# EAGLE board BrewTrollerV1.0 (EAGLE 5.00)
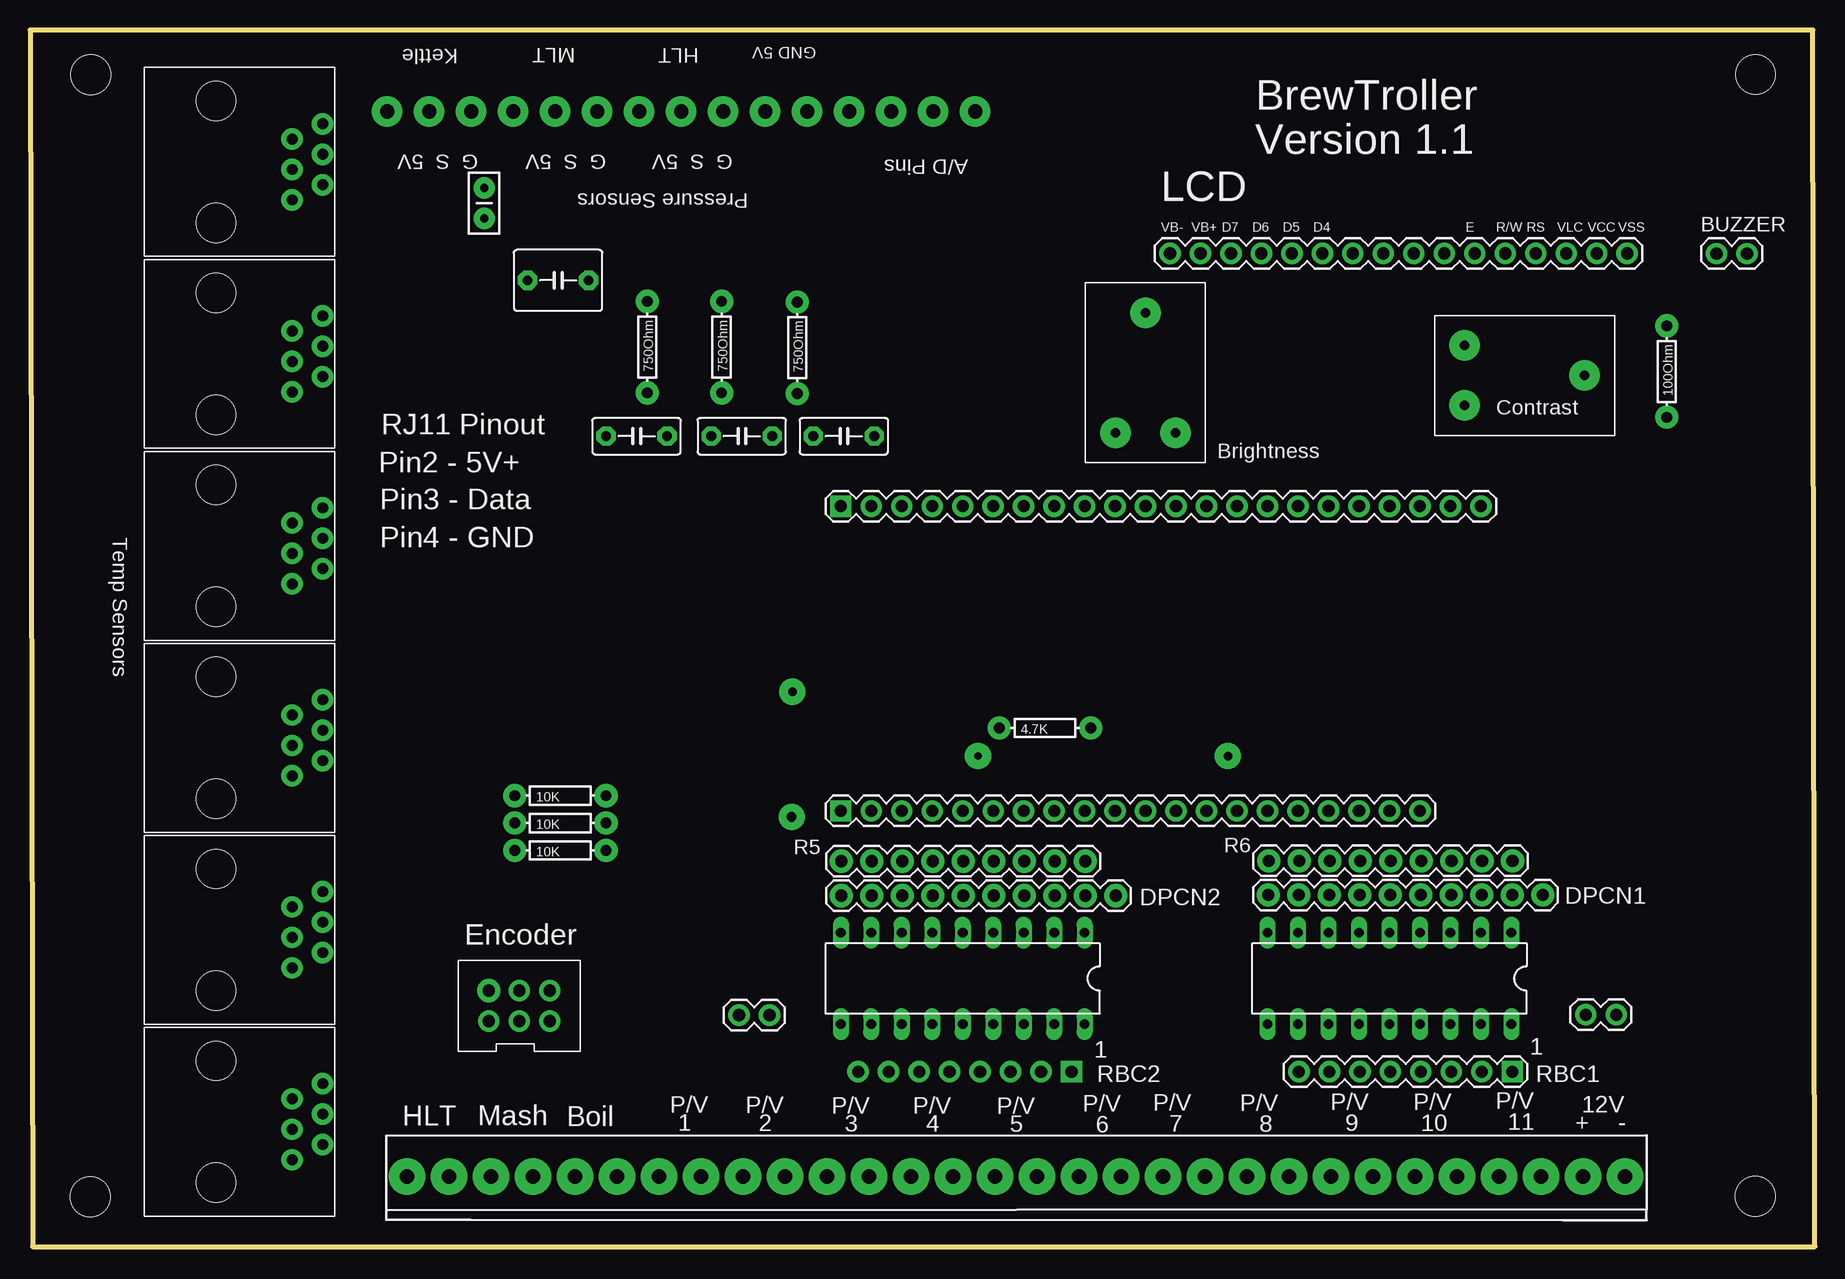
[diagram p0: board, top side]
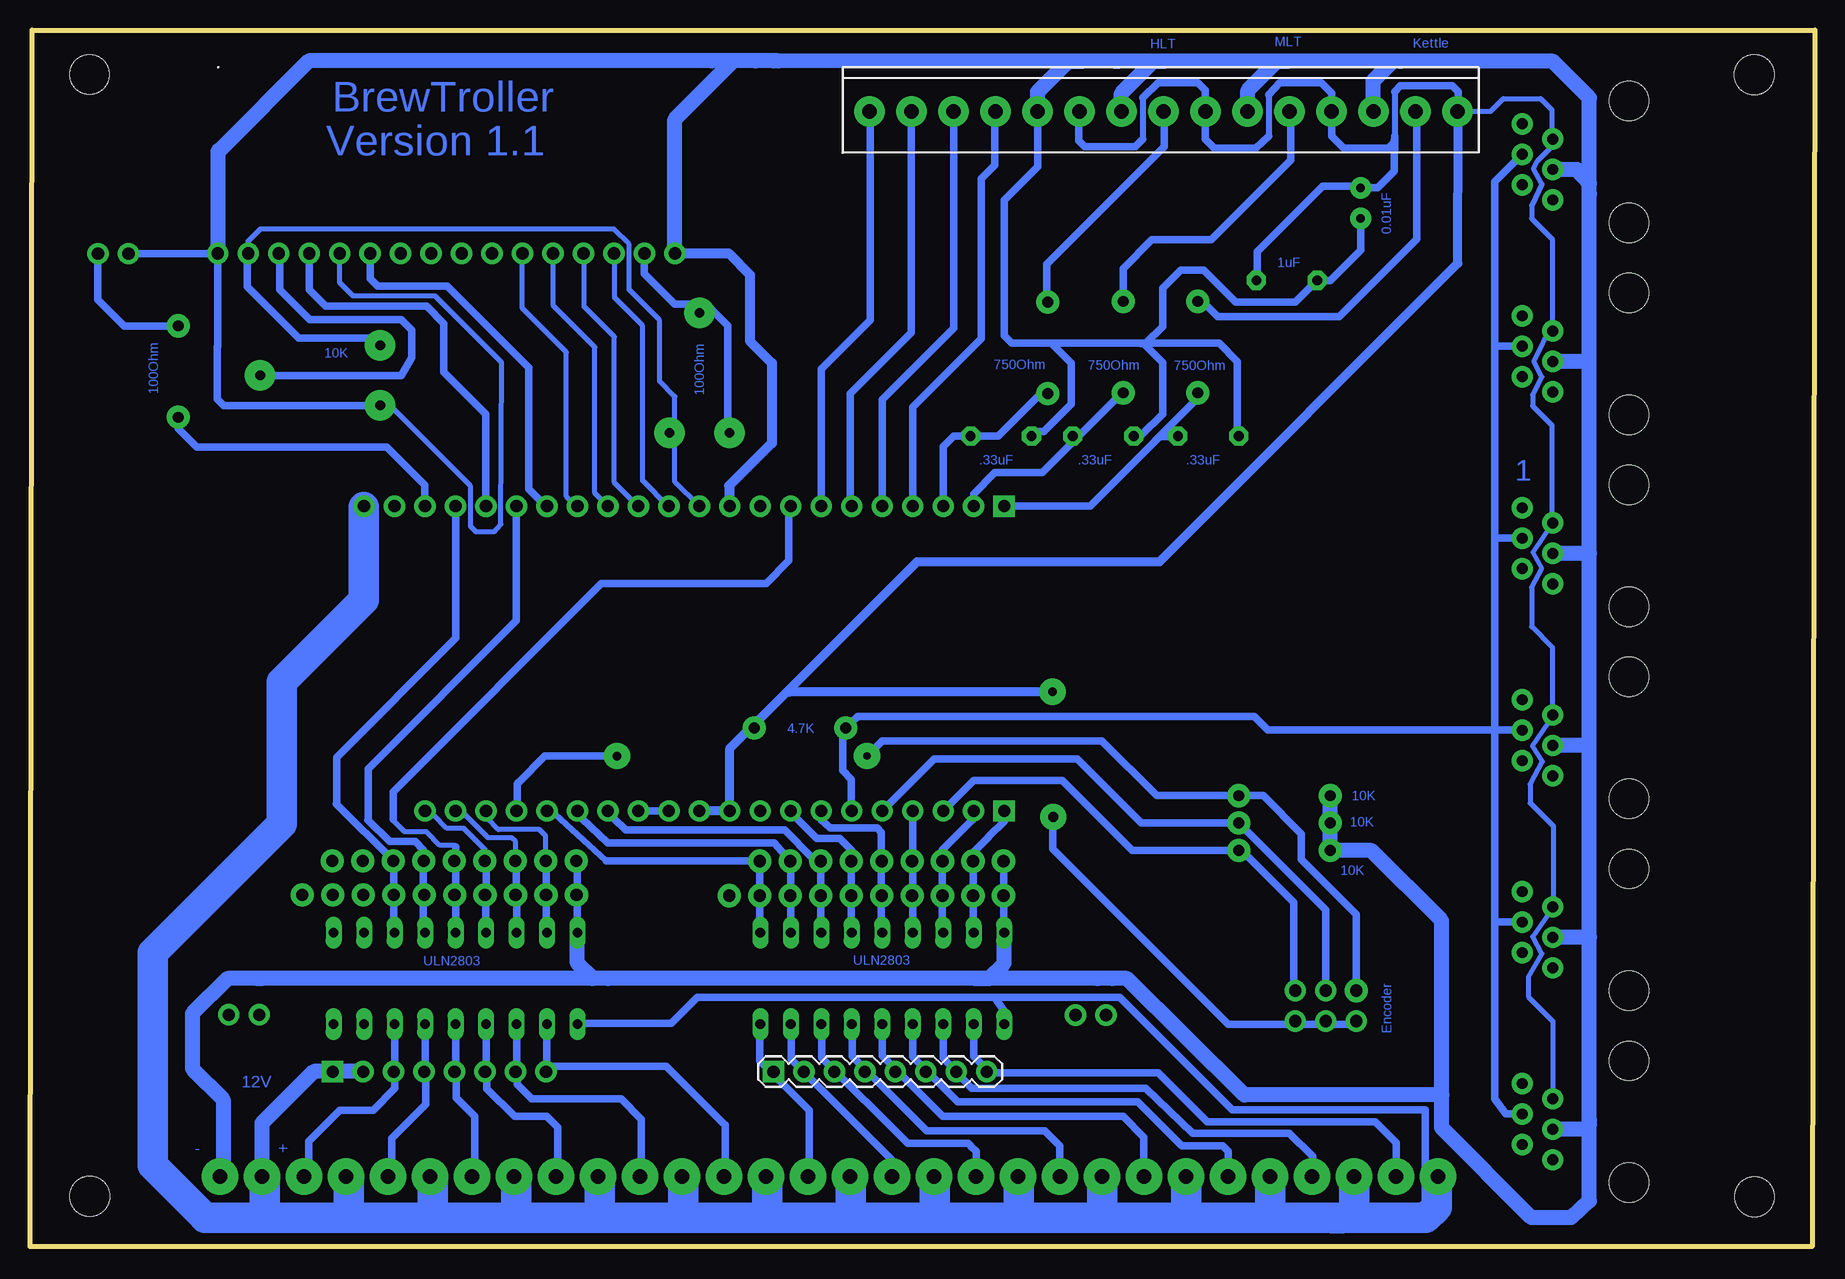
[diagram p1: board, bottom side, seen from below]

Size 148.74 x 101.42 mm. Coordinates in mm from the lower left corner, seen from the top.
Outline: 0.23,0 148.74,0 148.56,101.42 0,101.42 0.23,0
Copper layers (1*16): Top 0.035mm / dielectric 1.5mm / Bottom 0.035mm
Design rules "default *": minimum track width 10mil, minimum drill 24mil, track to track 8mil, track to pad 8mil, pad to pad 8mil, via to via 8mil, smd to smd 8mil, copper to edge 40mil, drill to drill 8mil, minimum pad ring 10mil, minimum via ring 8mil, stop-mask expansion 4mil, vias tented up to drill 0mil, thermal gap 10mil

## Footprints (pad centres in the part's own frame; a part is rotated, then mirrored left to right if it is on the bottom)
1X02 = drill 1.016 pad 1.778 round: 1 0,0; 2 2.54,0
1X10 = drill 1.016 pad 1.93 round: 1 0,0; 2 2.54,0; 3 5.08,0; 4 7.62,0; 5 10.16,0; 6 12.7,0; 7 15.24,0; 8 17.78,0; 9 20.32,0; 10 22.86,0
1X22HEADER = drill 1.016 pad 1.778 square: 1 -5.08,13.97 | drill 1.016 pad 1.778 round: 2 -2.54,13.97; 3 0,13.97; 4 2.54,13.97; 5 5.08,13.97; 6 7.62,13.97; 7 10.16,13.97; 8 12.7,13.97; 9 15.24,13.97; 10 17.78,13.97; 11 20.32,13.97; 12 22.86,13.97; 13 25.4,13.97; 14 27.94,13.97; 15 30.48,13.97; 16 33.02,13.97; 17 35.56,13.97; 18 38.1,13.97; 19 40.64,13.97; 20 43.18,13.97; 21 45.72,13.97; 25 48.26,13.97
1X20 = drill 1.016 pad 1.778 square: 1 0,0 | drill 1.016 pad 1.778 round: 2 2.54,0; 3 5.08,0; 4 7.62,0; 5 10.16,0; 6 12.7,0; 7 15.24,0; 8 17.78,0; 9 20.32,0; 10 22.86,0; 11 25.4,0; 12 27.94,0; 13 30.48,0; 14 33.02,0; 15 35.56,0; 16 38.1,0; 17 40.64,0; 18 43.18,0; 19 45.72,0; 20 48.26,0
DIL18 = drill 0.813 long: 1 -10.16,-3.81; 2 -7.62,-3.81; 3 -5.08,-3.81; 4 -2.54,-3.81; 5 0,-3.81; 6 2.54,-3.81; 7 5.08,-3.81; 8 7.62,-3.81; 9 10.16,-3.81; 10 10.16,3.81; 11 7.62,3.81; 12 5.08,3.81; 13 2.54,3.81; 14 0,3.81; 15 -2.54,3.81; 16 -5.08,3.81; 17 -7.62,3.81; 18 -10.16,3.81
SCREWTERMINAL3.5MM15P = drill 1.2 pad 2.54 round: 1 0.051,0.102; 2 3.551,0.102; 3 7.051,0.102; 4 10.551,0.102; 5 14.051,0.102; 6 17.551,0.102; 7 21.051,0.102; 8 24.551,0.102; 9 28.051,0.102; 10 31.551,0.102; 11 35.051,0.102; 12 38.551,0.102; 13 42.051,0.102; 14 45.551,0.102; 15 49.051,0.102
2X3SHROUDEDHEADER = drill 1.02 pad 1.778 round: P$1 0,2.54; P$3 2.54,5.08; P$4 2.54,2.54; P$5 5.08,5.08; P$6 5.08,2.54 | drill 1.02 pad 1.93 round: P$2 0,5.08
C5B5 = drill 0.813 pad 1.6 octagon: 1 -2.54,0; 2 2.54,0
C5B3 = drill 0.813 pad 1.6 octagon: 1 -2.54,0; 2 2.54,0
3319POT = drill 0.8 pad 2.54 round: P$1 0,0; P$2 -2.5,10; P$5 -5,0
RJ11VERTICAL = drill 0.9 pad 1.778 round: PIN1 1.905,8.89; PIN2 3.175,6.35; PIN3 4.445,8.89; PIN4 5.715,6.35; PIN5 6.985,8.89; PIN6 8.255,6.35 | hole 3.251: 0,0; 10.16,0
1X08 = drill 1.016 pad 1.778 square: 1 0,0 | drill 1.016 pad 1.778 round: 2 2.54,0; 3 5.08,0; 4 7.62,0; 5 10.16,0; 6 12.7,0; 7 15.24,0; 8 17.78,0
AXIAL-0.3 = drill 0.9 pad 1.93 round: P$1 -3.81,0; P$2 3.81,0
1X16 = drill 1.016 pad 1.778 round: 1 0,0; 2 2.54,0; 3 5.08,0; 4 7.62,0; 5 10.16,0; 6 12.7,0; 7 15.24,0; 8 17.78,0; 9 20.32,0; 10 22.86,0; 11 25.4,0; 12 27.94,0; 13 30.48,0; 14 33.02,0; 15 35.56,0; 16 38.1,0
STAND-OFF = hole 3.302: 0,0
CAP-PTH-SMALL2 = drill 0.7 pad 1.778 round: 1 0,0; 2 2.54,0
SCREWTERMINAL3.5MM30P = drill 1.2 pad 3.048 round: 1 0,0; 2 3.5,0; 3 7,0; 4 10.5,0; 5 14,0; 6 17.5,0; 7 21,0; 8 24.5,0; 9 28,0; 10 31.5,0; 11 35,0; 12 38.5,0; 13 42,0; 14 45.5,0; 15 49,0; 16 52.5,0; 17 56,0; 18 59.5,0; 19 63,0; 20 66.5,0; 21 66.5,0; 22 70,0; 23 73.5,0; 24 77,0; 25 80.5,0; 26 84,0; 27 87.5,0; 28 91,0; 29 94.5,0; 30 98,0; 31 101.5,0
1X09 = drill 1.016 pad 1.93 round: 1 0,0; 2 2.54,0; 3 5.08,0; 4 7.62,0; 5 10.16,0; 6 12.7,0; 7 15.24,0; 8 17.78,0; 9 20.32,0

## Placement (x,y rotation side)
BUZZER  [1X02]  140.54,82.78 0 top
CN2  [1X10]  67.61,29.26 0 top
E$1  [1X22HEADER]  72.64,47.75 0 top
E$2  [1X20]  67.56,36.32 0 top
E$3  ULN2803  [DIL18]  77.72,22.35 180 top
E$5  [SCREWTERMINAL3.5MM15P]  29.72,94.74 180 bottom
E$6  ULN2803  [DIL18]  113.28,22.35 180 top
E$8  [2X3SHROUDEDHEADER]  38.23,16.26 0 top
E$9  1uF  [C5B5]  44,80.55 0 top
E$10  0.33uF  [C5B3]  50.55,67.56 0 top
E$11  0.33uF  [C5B3]  59.31,67.56 0 top
E$12  0.33uF  [C5B3]  67.82,67.56 0 top
E$16  [3319POT]  95.45,67.84 0 top
E$17  [3319POT]  119.56,70.13 270 top
E$24  [RJ11VERTICAL]  15.49,15.49 270 top
E$25  [RJ11VERTICAL]  15.49,31.5 270 top
E$26  [RJ11VERTICAL]  15.49,47.5 270 top
E$27  [RJ11VERTICAL]  15.49,63.5 270 top
E$28  [RJ11VERTICAL]  15.49,79.5 270 top
E$29  [RJ11VERTICAL]  15.49,95.5 270 top
E$34  [1X08]  86.79,14.58 0 bottom
E$35  [1X08]  123.52,14.58 180 top
E$36  100Ohm  [AXIAL-0.3]  136.4,72.95 90 top
E$38  [1X16]  133.1,82.8 180 top
E$39  [1X02]  59.08,19.3 0 top
E$40  [STAND-OFF]  5.03,4.14 0 top
E$41  [STAND-OFF]  5.05,97.69 0 top
E$42  [STAND-OFF]  143.79,97.71 0 top
E$43  [STAND-OFF]  143.76,4.19 0 top
E$45  [1X10]  103.2,29.31 0 top
E$47  [1X02]  129.64,19.33 0 top
E$51  0.01uF  [CAP-PTH-SMALL2]  37.85,85.72 90 top
E$52  [SCREWTERMINAL3.5MM30P]  31.42,5.84 0 top
E$56  750Ohm  [AXIAL-0.3]  51.44,74.98 90 top
E$57  750Ohm  [AXIAL-0.3]  57.63,74.98 90 top
E$58  750Ohm  [AXIAL-0.3]  63.93,74.93 90 top
R1  10K  [AXIAL-0.3]  44.2,37.59 0 top
R2  10K  [AXIAL-0.3]  44.2,35.31 0 top
R3  10K  [AXIAL-0.3]  44.2,33.02 0 top
R4  4.7K  [AXIAL-0.3]  84.58,43.24 0 top
R5  10k  [1X09]  67.61,32.13 0 top
R6  10k  [1X09]  103.23,32.16 0 top

## Library data of the parts
BUZZER CN2 E$2 E$3 E$6 E$34-E$36 E$38-E$43 E$45 E$47 E$51 E$56-E$58 R1-R6 = SparkFun
E$1 E$5 E$8 E$24-E$29 E$52 = Personal
E$9-E$12 = capacitor-wima
E$16 E$17 = 3319Trimmer

## Nets
S$2: E$2.1
S$13: R5.1
S$20: E$1.17
S$21: E$1.20
S$24: E$2.7
S$60: E$1.11
S$63: E$2.3
S$64: E$2.5 R2.P$2
S$67: E$26.PIN4
S$72: E$3.9 E$6.9
S$75: E$24.PIN4 E$25.PIN4 E$27.PIN4
S$76: E$28.PIN4
S$77: E$24.PIN3 E$27.PIN3 E$29.PIN3
S$80: E$25.PIN3
S$84: E$1.4
S$85: E$1.5
S$91: E$1.7
S$96: E$2.4
S$101: E$27.PIN2
S$104: R1.P$1
S$105: E$6.11
S$119: E$2.12 E$2.13
S$129: E$2.10
S$133: E$38.16
S$152: E$1.6

## Tracks (layer width: path | path; a pad name or v marks a point on that pad's centre or on a via)
S$1
  Bottom 0.406: 110.72,61.7 110.77,61.75
S$2
  Bottom 0.61: E$2.1 67.56,35.46 68.83,34.19 68.83,34.16 70.13,32.87 70.13,27
S$3
  Bottom 0.61: 105.66,61.67 107.16,63.17 107.16,73.28 113.97,80.09 119.76,80.09 120.37,80.7 120.37,82.78
S$4
  Bottom 0.406: 103.12,61.62 104.04,62.54 104.04,74.55 107.72,78.23 107.72,82.91
S$5
  Bottom 0.406: 100.53,61.67 101.68,62.81 101.68,74.98 105.13,78.44 105.13,82.91
S$6
  Bottom 0.406: 98.04,61.7 100.05,63.7 100.05,75.84 102.56,78.36 102.56,82.85
S$7
  Bottom 0.406: 95.5,61.67 97.69,63.86 97.69,76.76 100.03,79.1 100.03,82.85
S$8
  Bottom 0.61: 127.94,82.8 127.94,79.76 125.45,77.27 117.81,77.27 116.94,76.4 116.94,74.09 117.81,72.59 128.57,72.59
S$9
  Bottom 0.406: 116.94,68.33 118.97,70.36 118.97,70.43
S$10
  Bottom 0.61: 119.63,75.72 126.34,75.72 130.66,80.03 130.66,82.09
S$11
  Bottom 0.406: 95.56,36.27 95.53,36.25
S$12
  Bottom 0.61: 70.1,36.3 70.1,35.69 72.72,33.07 72.72,27.08
S$13
  Bottom 0.61: 67.61,27.1 R5.1
S$14
  Bottom 2.54: 50.42,2.41 134.19,2.41
S$15
  Bottom 0.61: 100.1,35.71 99.11,34.72 86.26,34.72
S$16
  Bottom 0.61: 102.74,35.69 100.58,33.66 86.74,33.66 85.85,32.64
S$17
  Bottom 0.61: 103.15,27.08 103.15,32.13 103.2,32.18
S$18
  Bottom 0.61: 105.72,27 105.72,32.59
S$19
  Bottom 0.61: 110.9,27 110.92,26.98
S$20
  Bottom 0.61: E$1.17 108.2,52.2 120.57,39.83 120.57,35.64
S$21
  Bottom 0.61: E$1.20 115.85,61.75 115.85,63.5 119,66.65 134.85,66.65 136.37,68.17 136.37,69.14
S$22
  Bottom 0.61: 113.26,61.72 113.26,50.72 123.19,40.79 123.19,36.88
S$23
  Bottom 0.61: 81.03,42.65 81.03,39.7 80.29,38.96 80.29,36.27
S$24
  Bottom 0.61: E$2.7 82.8,35.56 82.07,34.9 78.13,34.9 77.83,34.52 77.83,27.15 77.78,27.1
S$25
  Bottom 1.27: 86.38,98.86 88.29,98.86 | 88.29,98.86 125.5,98.86 132.94,91.41 132.99,91.41 133.1,91.31 133.1,82.83 | 88.29,98.86 91.95,98.86
S$26
  Bottom 0.635: 103.19,18.6 95.31,18.6 93.16,20.76 68.33,20.76 67.56,19.62
S$27
  Bottom 2.54: 46.93,2.41 50.36,2.41
S$28
  Bottom 2.54: 52.39,3.24 52.39,5.84
S$29
  Bottom 2.54: 59.37,3.18 59.37,5.84
S$30
  Bottom 2.54: 66.36,3.11 66.36,5.84
S$31
  Bottom 2.54: 80.33,3.18 80.33,5.84
S$32
  Bottom 2.54: 87.31,2.79 87.31,5.84
S$33
  Bottom 2.54: 94.3,3.18 94.3,5.84
S$34
  Bottom 2.54: 101.28,3.11 101.28,5.84
S$35
  Bottom 2.54: 108.2,3.05 108.2,5.84
S$36
  Bottom 2.54: 115.19,3.18 115.19,5.84
S$37
  Bottom 2.54: 122.17,3.37 122.17,5.84
S$38
  Bottom 0.406: 126.42,28.78 126.37,28.73
S$39
  Bottom 2.54: 73.34,2.86 73.34,5.84
S$40
  Bottom 0.61: 68.78,20.78 57.91,20.78 48.54,11.41 32.46,11.41 32.46,5.03 32.49,5
S$41
  Bottom 0.61: 34.87,6.55 34.87,8.64 36.63,10.39 50.65,10.39 54.74,14.48 68.71,14.48 70.1,15.88 70.1,17.6 70.16,17.65
S$42
  Bottom 0.61: 41.86,6.53 41.86,7.52 43.79,9.45 51.87,9.45 55.75,13.21 70.26,13.21 72.64,15.72 72.64,17.6
S$43
  Bottom 0.61: 48.89,6.58 48.89,7.95 49.35,8.41 52.78,8.41 56.44,12.06 71.45,12.06 75.18,15.8 75.18,17.63 75.21,17.65
S$44
  Bottom 0.61: 77.67,17.63 77.75,17.7
S$45
  Bottom 0.61: 55.93,6.66 55.93,9.12 57.66,10.85 72.67,10.85 77.72,15.9 77.72,17.58 77.7,17.6
S$46
  Bottom 0.61: 62.92,6.58 62.92,8.41 64.16,9.65 74.02,9.65 80.21,15.85
S$47
  Bottom 0.61: 80.24,15.9 80.24,17.68
S$48
  Bottom 0.61: 105.66,17.6 105.69,17.58
S$49
  Bottom 0.61: 113.26,17.55 113.28,17.58
S$50
  Bottom 0.61: 111.68,5.87 111.68,10.87 113.23,12.42 113.23,15.14
S$51
  Bottom 0.61: 118.31,17.68 118.41,17.58
S$52
  Bottom 0.406: 133.12,82.8 133.07,82.75
S$53
  Bottom 0.406: 92.96,61.79 93.03,61.85
S$54
  Bottom 0.61: 80.31,27.13 80.31,32.94
S$55
  Bottom 0.61: 63.09,75.34 63.17,75.34 63.14,75.31 62.99,75.31 | 62.99,75.31 55.98,75.31 54.36,73.69 54.36,69.42 56.08,67.69 56.11,67.69 | 62.99,75.31 66.93,75.31 67.56,75.95 67.56,87.25 64.77,90.04 64.77,93.73
S$56
  Bottom 0.762: 88.54,43.36 74.83,57.07 54.63,57.07 29.74,81.97 29.72,93.68
S$57
  Bottom 0.61: 69.9,6.63 69.9,7.92 70.33,8.36 70.33,8.38 70.56,8.61 75.62,8.61 82.75,15.75 82.75,17.53 82.8,17.58
S$58
  Bottom 0.61: 87.91,27.03 87.91,32.08
S$59
  Bottom 0.406: 110.77,61.7 110.74,61.67
  Bottom 0.61: 110.77,61.7 110.77,69.42 114.25,72.9 114.25,76.94 115.7,78.38 124.1,78.38 125.48,79.76 125.48,82.88
S$60
  Bottom 0.406: E$1.11 95,63.75 95,70.87 96.27,72.14 96.27,77.22 98.81,79.76 98.81,83.57 100.08,84.84 129.54,84.84 130.56,83.82 130.56,83.62
S$61
  Bottom 0.813: 94.94,82.8 90.53,82.8 88.75,81.03 88.75,75.49 86.92,73.66 86.92,66.98 90.47,63.42 90.47,62.28
S$62
  Bottom 0.61: 97.56,82.8 97.54,82.78 97.54,81.13 95,78.59 92.38,78.59 90.58,76.78 90.58,69.06
S$63
  Bottom 0.61: E$2.3 70.1,38.86 62.74,38.86 56.9,33.02 47.75,33.02 43.43,28.7 43.43,22.1
S$64
  Bottom 0.61: E$2.5 73.41,40.64 61.47,40.64 56.13,35.31 R2.P$2 42.55,29.84 | 42.42,29.72 42.55,29.84 | 42.55,29.84 40.77,28.07 40.77,22.1
S$65
  Bottom 0.61: 77.72,42.16 59.44,42.16 54.86,37.59 48.26,37.59
S$66  (via drill 0.7 pad 2.18)
  other vias: 99.82,40.89
S$67
  Bottom 1.27: 19.05,41.78 E$26.PIN4
S$68
  Bottom 0.61: 47.37,37.59 45.97,37.59 42.8,34.42 42.8,32.26 38.23,27.69 38.23,22.1
S$69
  Bottom 0.61: 63.5,35.05 63.5,33.15 48.89,18.54 38.99,18.54
S$70
  Bottom 0.61: 82.83,27.08 82.83,32.61
S$71  (via drill 0.6 pad 2.18)
  Bottom 0.61: v78.99,40.89 77.72,42.16
S$72
  Bottom 0.406: 100.58,22.35 101.85,22.35
  Bottom 1.27: E$6.9 103.12,23.62 101.85,22.35 | E$3.9 67.56,23.62 68.83,22.35 69.98,22.35 | 129.46,22.35 100.58,22.35 69.98,22.35 | 129.46,22.35 129.79,22.35 | 58.55,22.35 69.98,22.35 | 129.46,22.35 132.28,22.35 135.2,19.43 135.2,14.83 132.64,12.27 132.64,6.96
S$73  (via drill 0.8 pad 2.18)
  other vias: 63.47,35.81
S$74  (via drill 0.7 pad 2.18)
  Bottom 0.406: 85.47,46.23 85.6,46.1
  Bottom 0.762: v63.52,46.25 85.47,46.23
S$75
  Bottom 0.406: 45.72,98.81 46.48,98.81 | 34.54,98.81 35.18,98.81 | 18.8,87.76 18.8,88.65
  Bottom 1.27: 57.78,94.62 57.78,96.14 55.12,98.81 54.23,98.81 | 47.24,94.62 47.24,96.39 44.83,98.81 43.94,98.81 | 36.83,94.36 36.83,97.16 35.18,98.81 | 54.23,98.81 45.72,98.81 43.94,98.81 | 54.23,98.81 58.29,98.81 | 43.94,98.81 34.54,98.81 21.84,98.81 18.8,95.76 18.8,87.76 18.8,57.79 | 21.74,89.79 19.84,89.79 18.8,88.65 | 18.8,57.79 E$27.PIN4 | 18.8,25.78 18.8,57.79 | 18.8,25.78 E$25.PIN4 | E$24.PIN4 19.18,9.78 18.8,10.16 18.8,25.78
S$76
  Bottom 0.406: 21.79,73.79 E$28.PIN4
  Bottom 1.27: 18.87,73.79 21.79,73.79
S$77
  Bottom 0.406: 26.67,43.18 26.67,43.05
  Bottom 0.635: E$29.PIN3 26.67,88.77 26.67,59.05 | 80.26,43.74 79.76,44.2 46.74,44.2 45.59,43.05 26.67,43.05 25.17,43.05 | 26.67,59.05 26.67,43.18 26.67,12.32 25.78,11.05 E$24.PIN3 | 26.67,59.05 E$27.PIN3
S$78
  Bottom 0.61: 43.69,94.62 43.69,90.55 50.29,83.95 55.24,83.95 57.66,81.53 57.66,78.74
S$79
  Bottom 0.635: 25.17,75.06 26.54,75.06
S$80
  Bottom 0.635: E$25.PIN3 26.54,27.05
S$81
  Bottom 0.61: 54.23,94.62 54.23,91.69 64.01,81.91 64.01,78.87
S$82
  Bottom 0.61: 64.77,67.94 64.26,67.94 61.98,70.23 61.98,73.66 63.5,75.18
S$83
  Bottom 0.61: 118.49,35.61 118.49,37.92 101.14,55.27 92.56,55.27 | 92.56,55.27 92.38,55.27 | 92.56,55.27 88.09,55.27 88.06,55.3 87.38,55.3 85.5,57.18 85.5,61.65
S$84
  Bottom 0.61: E$1.4 75.18,69.98 69.47,75.69 69.47,89.03 68.33,90.17 68.33,93.73
S$85
  Bottom 0.61: E$1.5 77.72,70.61 71.75,76.58 71.75,93.73
S$86
  Bottom 0.61: 133.1,75.01 133.1,75.03 | 133.1,75.03 133.1,82.07 | 133.1,75.03 133.12,75.01 133.12,70.64 132.61,70.13 119.79,70.13
S$87
  Bottom 0.406: 89.28,22.55 89.26,22.53
S$88
  Bottom 0.61: 108.18,27.03 108.25,32.64
S$89
  Bottom 0.61: 110.74,27.05 110.72,32.77
S$90
  Bottom 0.406: 21.87,28.27 21.87,27.74
S$91
  Bottom 0.61: E$1.7 82.8,73.15 78.74,77.22 78.74,93.73
S$92
  Bottom 1.27: 121.03,14.6 125.09,14.6 129.41,10.29 129.41,6.73
S$93
  Bottom 0.406: 29.74,94.64 27.03,94.64 25.96,95.71 22.86,95.71 21.92,94.77 21.92,92.2
S$94
  Bottom 0.508: 45.52,96.01 45.52,92.58
  Bottom 0.61: 40.26,95.5 40.26,96.14 41.15,97.03 44.58,97.03 45.52,96.01 | 45.52,92.58 46.61,91.57 50.04,91.57 50.8,92.33 50.8,93.6
S$95
  Bottom 0.55: 105.03,36.07 100.74,32.13
  Bottom 0.61: 100.74,32.13 87.88,32.13
S$96
  Bottom 0.61: 75.18,27.1 E$2.4
S$97
  Bottom 0.61: 113.39,27.2 113.49,27.1 113.46,27.1
S$98
  Bottom 0.61: 99.85,40.89 101.96,40.89
S$99
  Bottom 0.61: 136.37,76.73 140.87,76.73 143.08,78.94 143.08,82.75
S$100
  Bottom 1.27: 129.18,5.82 129.16,5.84
  Bottom 2.54: 129.18,3.2 129.18,5.82
S$101
  Bottom 0.406: E$27.PIN2 23.49,57.86 22.78,56.51 23.6,54.97 23.6,51.69 21.87,49.96 21.87,44.37
S$102
  Bottom 2.54: 134.14,2.39 138.53,6.78 138.53,24.49 127.76,35.26 127.76,47.07 120.93,53.9 120.93,61.65
S$103
  Bottom 0.61: 133.12,82.78 140.54,82.78
S$104
  Bottom 0.406: 40.39,33.02 40.39,32.77 | 31.11,13.84 31.11,13.59
  Bottom 1.27: R1.P$1 40.39,33.02 36.96,33.02 31.11,27.18 31.11,13.84 31.11,9.91 23.62,2.41 20.32,2.41 18.8,3.81 18.8,10.54
S$105
  Bottom 0.61: E$6.11 105.66,15.06 105.69,15.04 95.73,15.04 91.03,10.34 91.01,10.34 90.81,10.13 90.81,5.84
S$106
  Bottom 0.61: 115.85,27.08 115.9,27.13
S$107
  Bottom 2.54: 47.57,2.39 32.41,2.39 31.52,3.28 31.52,5.79
S$108
  Bottom 2.54: 38.38,5.74 38.46,5.66
S$109
  Bottom 2.54: 39.42,2.36 40.21,2.36
S$110
  Bottom 0.406: 45.4,5.78 45.53,5.91
  Bottom 2.54: 45.4,3.87 45.4,5.78
S$111
  Bottom 2.54: 38.38,2.46 38.38,5.84
S$112
  Bottom 1.27: 31.09,12.65 47.55,12.65 57.33,22.35 59.77,22.35
S$113
  Bottom 0.61: 76.86,6.66 76.86,7.14 85.32,15.6 85.32,17.73 85.42,17.83
S$114
  Bottom 0.61: 83.79,6.58 83.79,11.35 87.94,15.49 87.94,17.65 87.88,17.7
S$115
  Bottom 0.61: 97.79,5.87 97.79,10.62 99.49,12.32 106.93,12.32 108.15,13.54 108.15,14.99 108.18,15.01
S$116
  Bottom 0.61: 120.85,17.73 120.9,17.68
S$117
  Bottom 0.61: 120.88,27.05 120.95,27.13
S$118
  Bottom 0.61: 113.26,27 113.26,33.3
S$119
  Bottom 0.406: 97.99,36.32 E$2.13
  Bottom 0.61: E$2.12 97.99,36.32
S$120
  Bottom 0.61: 72.64,62.36 72.64,66.68 71.75,67.56 68.07,67.56 64.64,70.99
S$121
  Bottom 0.61: 102.03,40.89 105.84,40.89 108.03,38.71 108.05,38.71 108.1,38.66 108.1,38.61 108.13,38.58 108.13,36.3 108.15,36.27
S$122
  Bottom 0.61: 115.95,32.77 115.95,33.07 116.64,33.76 118.77,33.76 120.6,35.59
S$123
  Bottom 0.4: 109.5,60.2 109.45,73.71 | 112.01,60.05 112.01,63.4
  Bottom 0.406: 122.94,82.83 122.94,80.37 121.82,79.25 114.99,79.25 109.45,73.71 | 109.5,60.2 110.06,59.59 111.56,59.59 112.01,60.05 | 112.01,63.4 116.92,68.3
S$124
  Bottom 0.813: 94.89,82.75 94.84,82.8
S$125
  Bottom 0.813: 58.06,98.81 57.81,98.83
  Bottom 1.27: 58.06,98.81 86.77,98.86
S$126
  Bottom 0.61: 37.85,85.72 37.85,83.06 40.39,80.52 41.53,80.52 43.31,78.74 48.26,78.74 50.93,81.41 52.83,81.41 54.36,79.88 54.36,76.71 55.75,75.31 | 56.16,75.29 56.13,75.31 55.75,75.31 | 55.75,75.31 50.42,75.31 | 50.42,75.31 50.29,75.31 | 50.42,75.31 49.66,75.31 48.13,73.79 48.13,68.07
S$127
  Bottom 0.61: 115.98,32.77 115.98,27.03
S$128
  Bottom 0.61: 118.44,27 118.44,32.13 123.22,36.91
S$129
  Bottom 0.762: 88.65,43.31 90.42,41.53 E$2.10 93.16,36.32
S$130
  Bottom 0.61: 53.39,67.54 54.61,67.54 60.4,61.75 66.75,61.75
S$131
  Bottom 0.508: 35.03,96.27 35.03,92.58
  Bottom 0.61: 33.53,96.77 34.54,96.77 35.03,96.27 | 40.26,93.6 40.26,92.58 39.24,91.57 35.56,91.57 35.05,92.07 35.03,92.58 35.05,89.66 36.45,88.26 37.85,88.26 37.97,88.39 41.02,88.39
  Bottom 0.635: 33.78,96.77 33.53,96.77 30.23,96.77 29.72,96.27 29.72,95.45
S$132
  Bottom 0.61: 51.64,70.51 54.97,67.18
S$133
  Bottom 1.27: E$38.16 95,93.98 90.17,98.81
S$134
  Bottom 0.61: 56.08,75.29 55.75,75.29
S$135
  Bottom 0.61: 46.48,80.52 46.48,82.93 41.15,88.26
S$136
  Bottom 0.61: 70.1,62.36 70.1,62.74 68.33,64.52 64.39,64.52 58.17,70.74
S$137
  Bottom 0.406: 105.72,32.82 105.77,32.82 105.77,34.24 106.3,34.77 109.7,34.77 110.62,35.69
S$138
  Bottom 0.61: 50.88,78.64 49.78,77.55 39.62,77.55 33.2,83.97 33.2,93.75
S$139
  Bottom 0.61: 115.77,17.7 115.82,17.65
S$140
  Bottom 0.61: 115.77,15.06 115.77,11.86 118.59,9.04 118.59,5.87 118.67,5.79
S$141
  Bottom 0.61: 104.78,5.84 104.78,9.93 105.69,10.85 108.36,10.85 110.67,13.16 110.67,15.09
S$142
  Bottom 0.61: 118.34,15.11 118.34,13.18 120.14,11.38 122.91,11.38 125.5,8.79 125.5,5.99 125.6,5.89
S$143
  Bottom 0.61: 108.18,15.06 108.18,18.54 108.25,18.62
S$144
  Bottom 0.61: 110.72,15.06 110.72,18.54
S$145
  Bottom 0.61: 113.28,15.11 113.28,18.49 113.36,18.57
S$146
  Bottom 0.61: 115.8,15.11 115.8,18.44 115.62,18.62 115.67,18.62
S$147
  Bottom 0.61: 118.36,15.01 118.36,18.54 118.34,18.57
S$148
  Bottom 0.61: 85.34,27.1 85.34,32.61
S$149
  Bottom 0.508: 56.01,95.76 56.01,92.33
  Bottom 0.61: 50.8,95.5 50.8,96.39 51.44,97.03 54.74,97.03 56.01,95.76 | 56.01,92.33 56.64,91.69 60.83,91.69 61.34,92.2 61.34,93.73
S$150
  Bottom 1.27: 64.77,94.62 64.77,96.27 62.23,98.81 61.09,98.81
S$151
  Bottom 0.61: 77.7,61.77 77.72,61.75
S$152
  Bottom 0.61: 80.21,61.77 E$1.6 80.39,61.85 80.39,71.12 75.31,76.2 75.31,93.85
S$153
  Bottom 0.61: 75.18,61.67 75.21,61.7
S$154
  Bottom 0.61: 86.41,34.72 85.85,34.72 83.57,32.38
S$155
  Bottom 0.61: 84.84,35.69 83.19,34.04 81.28,34.04 80.26,33.02
S$156
  Bottom 0.406: 108.28,32.89 108.28,33.76 108.61,34.09 110.57,34.09 112.52,36.04
S$157
  Bottom 0.406: 110.85,32.97 110.85,33.12 112.6,34.87 114,34.87 115.11,35.99
S$158
  Bottom 0.406: 113.36,33.45 114.58,33.45 115.7,34.57 117.53,34.57 118.52,35.56
S$159
  Bottom 0.406: 21.84,28.24 21.84,28.5 21.79,28.5
S$160
  Bottom 0.406: 21.87,92.38 21.87,91.8
S$161
  Bottom 0.406: 21.89,91.85 21.89,91.72 23.14,90.47 23.47,89.84 22.76,88.57 23.57,86.84 23.6,86.82 23.6,85.7 21.87,83.97 21.87,76.96 23.42,73.76 22.76,72.49 23.52,71.02 23.52,70.08 21.92,68.48 21.92,60.3
S$162
  Bottom 0.406: 21.82,44.27 23.55,41.73 22.71,40.44 23.72,38.56 23.72,36.98 21.79,35.05 21.79,28.35
S$163
  Bottom 0.406: 21.82,28.27 23.52,25.83 22.76,24.41 23.88,22.48 23.88,20.83 21.84,18.8 21.84,12.4

## Text on the board
Bottom: Kettle | MLT | HLT | BrewTroller | Version 1.1 | 0.01uF | 1uF | 100Ohm | 100Ohm | 10K | 750Ohm | 750Ohm | 750Ohm | .33uF | .33uF | .33uF | 1 | 4.7K | 10K | 10K | 10K | ULN2803 | ULN2803 | Encoder | 12V | + | -
tPlace: BrewTroller | Version 1.1 | LCD | VB- | VB+ | D7 | D6 | D5 | D4 | E | R/W | RS | VLC | VCC | VSS | Contrast | Brightness | P/V | P/V | P/V | P/V | P/V | P/V | P/V | P/V | P/V | P/V | HLT | Mash | P/V | Boil | 1 | 2 | 3 | 4 | 5 | 6 | 7 | 8 | 9 | 10 | 11
tNames: Kettle | MLT | HLT | 5V | GND | G S 5V | G S 5V | G S 5V | A/D Pins | Pressure Sensors | RJ11 Pinout | Pin2 - 5V+ | Pin3 - Data | Temp Sensors | Pin4 - GND | DPCN2 | DPCN1 | Encoder | 1 | 1 | RBC2 | RBC1 | 12V | + | -